# Altium PCB PCB-15_19_prototyp1.PcbDoc (part 3 of 4)
Units mm, origin at the board's own origin, x right, y up, seen from the top; angles counter-clockwise.
Board outline 190 x 150 mm, 8 copper layers (Top Layer, VCC3V3, Layer 2, layer 3, layer 4, layer 5, GND, Bottom Layer), stack 1.682 mm thick; 129 components, 396 nets, 1206 pads, 615 vias.
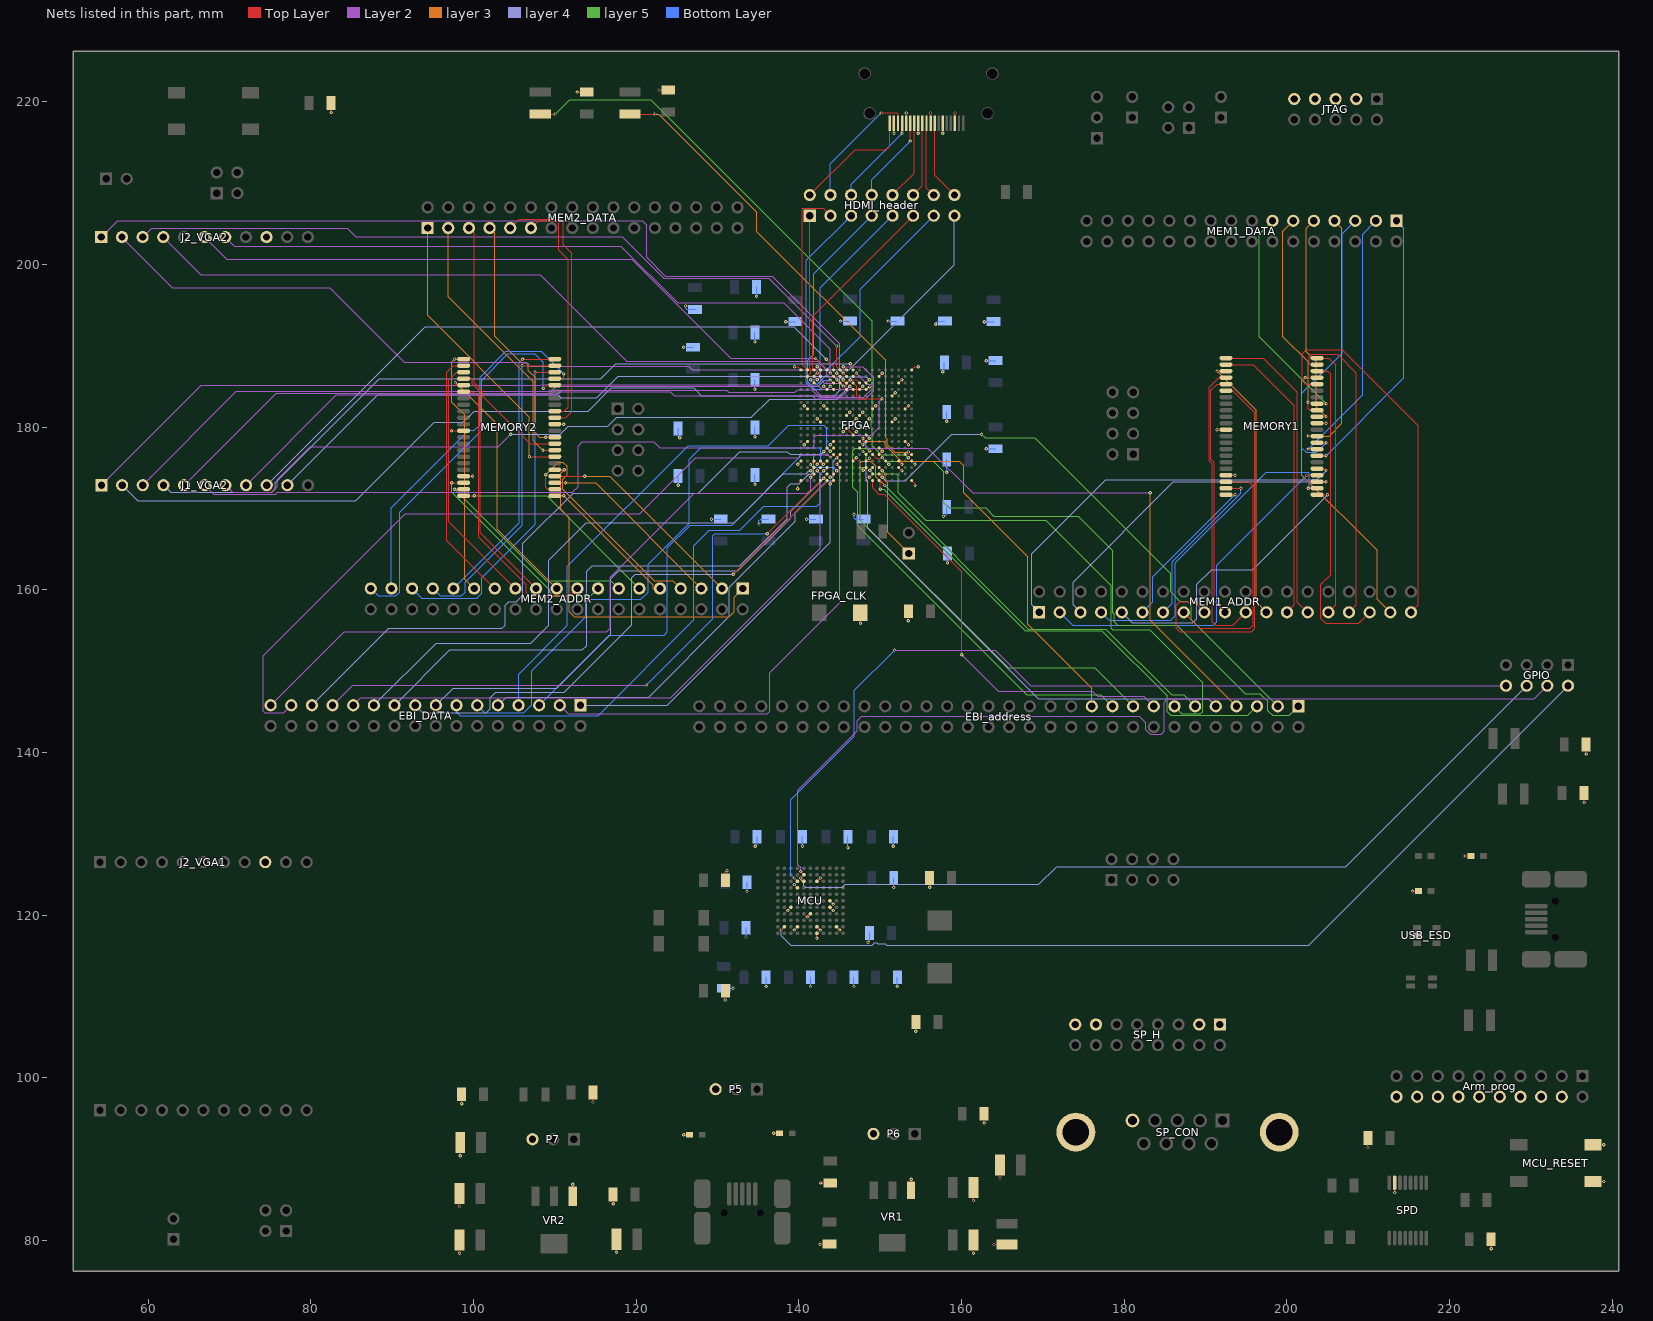
[diagram p9: the nets of this part, all layers, seen from the top]

## Via types
v1: diameter 0.4, hole 0.2, Top Layer to Bottom Layer, 599 vias
v2: diameter 0.4, hole 0.2, Top Layer to Bottom Layer, tented top, 8 vias
v3: diameter 7, hole 5, Top Layer to Bottom Layer, 4 vias
v4: diameter 1.3, hole 0.9, Top Layer to Bottom Layer, 3 vias
v5: diameter 2.1, hole 1.6, Top Layer to Bottom Layer, 1 vias

## Nets (pads, with @x,y where several pads share a name; then routed paths per layer and width w, separated by ;. In a path a pad name is that pad's centre, name@x,y a point inside that pad or via, vN(x,y) a via of type N, cw(c..) or ccw(c..) an arc to the next point about the centre after c; other vN are vias at no path point) (continued)
FPGA.A19: EBI_address.21 FPGA.M10 | length 50.7
  Top Layer w0.1: FPGA.M10@147.47,178.23 147.875,177.825 v1(147.879,177.825)
  layer 3 w0.1: v1(147.879,177.825) 148.305,178.252 150.408,178.252 150.656,178.003 150.656,177.744 152.581,175.819 159.715,175.819 160.274,175.26 160.274,171.933 168.123,164.084 168.123,155.778 176.022,147.879 EBI_address.21@176.022,145.669
FPGA.A20: EBI_address.19 FPGA.P11 | length 53
  Top Layer w0.1: FPGA.P11@148.27,176.63 v1(148.71,177.07)
  layer 5 w0.1: v1(148.71,177.07) 148.361,177.419 146.914,177.419 146.6,177.105 146.6,172.577 147.218,171.958 147.218,167.869 167.996,147.091 177.14,147.091 EBI_address.19@178.562,145.669
FPGA.A21: EBI_address.17 FPGA.N10 | length 52.9
  Top Layer w0.1: FPGA.N10@147.47,177.43 147.879,177.021 v1(147.879,177.013)
  layer 5 w0.1: v1(147.879,177.013) 148.311,176.581 148.207,175.055 147.574,175.049 147.574,168.554 165.735,150.393 176.378,150.393 EBI_address.17@181.102,145.669
FPGA.A22: EBI_address.15 FPGA.V12 | length 52.6
  Top Layer w0.1: FPGA.V12@149.07,173.43 149.07,172.522 149.837,171.755 150.495,171.755 160.02,162.23 v1(160.02,152.019)
  Layer 2 w0.1: v1(160.02,152.019) 164.516,147.523 176.098,147.523 176.733,146.888 182.423,146.888 EBI_address.15@183.642,145.669
FPGA.A23: EBI_address.13 FPGA.T12 | length 64
  Top Layer w0.1: v1(148.729,174.689) FPGA.T12@149.07,175.03
  layer 5 w0.1: v1(148.729,174.689) 149.149,174.269 151.994,174.269 152.222,174.041 152.222,171.929 155.606,168.546 170.335,168.546 178.402,160.479 178.402,155.278 178.616,155.064 183.137,155.064 189.636,148.565 189.636,145.009 189.382,144.755 187.096,144.755 EBI_address.13@186.182,145.669
FPGA.A24: EBI_address.11 FPGA.T11 | length 56
  Top Layer w0.1: v1(147.93,174.701) 147.941,174.701 FPGA.T11@148.27,175.03
  layer 5 w0.1: v1(150.571,172.822) 168.224,155.169 177.749,155.169 185.852,147.066 187.325,147.066 EBI_address.11@188.722,145.669
  layer 3 w0.1: v1(147.93,174.701) 147.523,175.108 147.523,175.616 147.708,175.8 148.837,175.8 149.479,175.158 149.479,173.914 v1(150.571,172.822)
FPGA.A25: EBI_address.9 FPGA.R11 | length 61.3
  Top Layer w0.1: FPGA.R11@148.27,175.83 148.463,175.83 148.463,175.946 v1(148.692,176.174)
  layer 4 w0.1: v1(148.692,176.174) 148.311,175.793 148.311,173.507 148.488,173.33 148.488,167.564 169.443,146.609 190.322,146.609 EBI_address.9@191.262,145.669
FPGA.AD00: EBI_DATA.31 FPGA.U3 | length 83.2
  Top Layer w0.1: v1(141.478,173.838) FPGA.U3@141.87,174.23
  Layer 2 w0.1: EBI_DATA.31@75.057,145.796 84.099,154.838 116.408,154.838 116.815,155.245 116.815,161.541 127.155,171.882 141.046,171.882 141.478,172.314 v1(141.478,173.838)
FPGA.AD01: EBI_DATA.29 FPGA.P6 | length 91.4
  Top Layer w0.1: v1(143.891,176.251) FPGA.P6@144.27,176.63
  Layer 2 w0.1: EBI_DATA.29@77.597,145.796 76.683,144.882 74.346,144.882 74.143,145.085 74.143,151.867 91.618,169.342 120.421,169.342 127.304,176.225 139.903,176.225 140.259,176.581 143.561,176.581 v1(143.891,176.251)
FPGA.AD02: EBI_DATA.27 FPGA.N5 | length 81.9
  Top Layer w0.1: v1(143.078,176.962) 143.078,177.038 FPGA.N5@143.47,177.43
  layer 4 w0.1: EBI_DATA.27@80.137,145.796 89.586,155.245 103.48,155.245 103.886,155.651 103.886,158.09 104.343,158.547 105.283,158.547 106.07,159.334 106.07,165.71 112.243,171.882 127.61,171.882 132.708,176.98 138.582,176.98 138.931,176.632 142.748,176.632 v1(143.078,176.962)
FPGA.AD03: EBI_DATA.25 FPGA.V4 | length 77.4
  Top Layer w0.1: v1(136.118,166.878) FPGA.V4@142.67,173.43
  Layer 2 w0.1: EBI_DATA.25@82.677,145.796 85.166,148.285 v1(121.26,148.285)
  Bottom Layer w0.1: v1(121.26,148.285) 129.388,156.413 129.388,166.624 129.642,166.878 v1(136.118,166.878)
FPGA.AD04: EBI_DATA.23 FPGA.T4 | length 75.6
  Top Layer w0.1: v1(142.265,174.625) FPGA.T4@142.67,175.03
  Layer 2 w0.1: EBI_DATA.23@85.217,145.796 86.157,146.736 124.231,146.736 142.621,165.125 142.621,174.269 v1(142.265,174.625)
FPGA.AD05: EBI_DATA.21 FPGA.T3 | length 70.9
  Top Layer w0.1: v1(141.465,174.625) FPGA.T3@141.87,175.03
  layer 4 w0.1: EBI_DATA.21@87.757,145.796 95.402,153.441 107.036,153.441 109.245,155.651 109.245,163.601 113.894,168.25 132.055,168.25 138.074,174.269 140.883,174.269 141.238,174.625 v1(141.465,174.625)
FPGA.AD06: EBI_DATA.19 FPGA.R3 | length 72.7
  Top Layer w0.1: v1(141.427,175.387) FPGA.R3@141.87,175.83
  layer 4 w0.1: EBI_DATA.19@90.297,145.796 97.104,152.603 113.386,152.603 113.919,153.137 113.919,162.255 114.605,162.941 132.74,162.941 138.557,168.758 138.557,172.616 138.989,173.048 140.079,173.048 141.224,174.193 141.529,174.193 141.834,174.498 141.834,174.981 v1(141.427,175.387)
FPGA.AD07: EBI_DATA.17 FPGA.V5 | length 67
  Top Layer w0.1: v1(131.94,161.9) FPGA.V5@143.47,173.43
  layer 4 w0.1: EBI_DATA.17@92.837,145.796 93.751,144.882 101.6,144.882 102.083,145.364 102.083,146.71 102.743,147.371 111.15,147.371 119.482,155.702 119.482,161.493 119.888,161.9 v1(131.94,161.9)
FPGA.AD08: EBI_DATA.15 FPGA.U5 | length 64.4
  Top Layer w0.1: v1(143.078,173.711) 143.078,173.838 FPGA.U5@143.47,174.23
  layer 4 w0.1: EBI_DATA.15@95.377,145.796 97.485,147.904 110.236,147.904 116.891,154.559 116.891,161.341 117.856,162.306 132.499,162.306 139.014,168.822 139.014,169.647 v1(143.078,173.711)
FPGA.AD09: EBI_DATA.13 FPGA.T5 | length 66.7
  Top Layer w0.1: v1(143.078,174.625) 143.281,174.828 143.47,174.828 FPGA.T5@143.47,175.03
  Bottom Layer w0.1: EBI_DATA.13@97.917,145.796 97.917,144.958 98.349,144.526 115.316,144.526 127.102,156.312 127.102,165.43 128.981,167.31 132.74,167.31 135.687,170.256 142.189,170.256 142.621,170.688 142.621,174.168 v1(143.078,174.625)
FPGA.AD10: EBI_DATA.11 FPGA.R5 | length 69
  Top Layer w0.1: v1(143.002,175.438) 143.078,175.438 FPGA.R5@143.47,175.83
  Bottom Layer w0.1: EBI_DATA.11@100.457,145.796 101.371,144.882 106.197,144.882 107.163,145.847 107.163,150.063 113.792,156.693 113.792,158.42 114.198,158.826 120.574,158.826 121.463,159.715 121.463,163.119 126.517,168.173 126.517,176.073 127.914,177.47 142.646,177.47 142.697,177.419 142.697,175.743 v1(143.002,175.438)
FPGA.AD11: EBI_DATA.9 FPGA.P7 | length 58.9
  Top Layer w0.1: v1(144.678,176.225) 144.678,176.238 FPGA.P7@145.07,176.63
  layer 4 w0.1: EBI_DATA.9@102.997,145.796 104.013,146.812 121.564,146.812 131.47,156.718 131.47,160.325 139.548,168.402 139.548,169.443 143.485,173.38 144.069,173.38 144.221,173.533 144.221,175.768 v1(144.678,176.225)
FPGA.AD12: EBI_DATA.7 FPGA.N6 | length 62.4
  Top Layer w0.1: v1(143.866,177.038) 143.878,177.038 FPGA.N6@144.27,177.43
  Bottom Layer w0.1: EBI_DATA.7@105.537,145.796 105.537,149.631 111.531,155.626 111.531,162.865 126.39,177.724 136.22,177.724 138.735,180.238 143.053,180.238 143.459,179.832 143.459,177.444 v1(143.866,177.038)
FPGA.AD13: EBI_DATA.5 FPGA.T7 | length 57.4
  Top Layer w0.1: v1(144.672,174.632) FPGA.T7@145.07,175.03
  Bottom Layer w0.1: EBI_DATA.5@108.077,145.796 116.713,154.432 123.444,154.432 123.85,154.838 123.85,165.151 126.644,167.945 131.724,167.945 140.36,176.581 141.63,176.581 141.834,176.378 141.834,175.26 142.037,175.057 144.247,175.057 v1(144.672,174.632)
FPGA.AD14: EBI_DATA.3 FPGA.R7 | length 61
  Top Layer w0.1: v1(144.678,175.438) FPGA.R7@145.07,175.83
  Layer 2 w0.1: EBI_DATA.3@110.617,145.796 111.658,144.755 136.144,144.755 136.423,145.034 136.423,149.809 145.034,158.42 145.034,175.082 v1(144.678,175.438)
FPGA.AD15: EBI_DATA.1 FPGA.V6 | length 46.8
  Top Layer w0.1: v1(143.866,173.025) FPGA.V6@144.27,173.43
  layer 4 w0.1: EBI_DATA.1@113.157,145.796 123.825,145.796 143.866,165.837 v1(143.866,173.025)
FPGA.CLK_SIG: CLK_JMP.1 FPGA.T13 | length 12.1
  Top Layer w0.1: FPGA.T13@149.87,175.03 150.266,174.634 v1(150.266,174.625)
  layer 3 w0.1: v1(150.266,174.625) 150.622,174.269 150.622,173.471 150.921,173.172 150.921,167.062 CLK_JMP.1@153.524,164.459
FPGA.CS0: EBI_address.5 FPGA.V13 | length 60.6
  Top Layer w0.1: FPGA.V13@149.87,173.43 150.063,173.237 150,173.174 v1(150,172.37)
  layer 5 w0.1: v1(150,172.37) 150.413,172.37 167.818,154.965 177.241,154.965 185.268,146.939 185.268,145.009 185.725,144.551 195.224,144.551 EBI_address.5@196.342,145.669
FPGA.CS1: EBI_address.7 FPGA.M11 | length 69.7
  Top Layer w0.1: v1(147.879,178.638) 147.879,178.621 FPGA.M11@148.27,178.23
  Layer 2 w0.1: v1(147.879,178.638) 147.879,178.32 148.229,177.97 148.229,177.711 148.52,177.42 155.879,177.42 161.366,171.933 v1(183.21,171.933)
  layer 3 w0.1: v1(183.21,171.933) 183.21,156.261 EBI_address.7@193.802,145.669
FPGA.REN: EBI_address.1 FPGA.P12 | length 74.1
  Top Layer w0.1: FPGA.P12@149.07,176.63 149.54,176.16 150.16,176.16 v1(150.25,176.25)
  layer 5 w0.1: v1(150.25,176.25) 150.673,175.826 150.673,175.793 156.54,175.793 157.836,174.498 157.836,170.688 158.471,170.053 162.966,170.053 163.982,169.037 174.346,169.037 178.602,164.781 178.602,157.201 178.791,157.012 178.791,156.058 179.197,155.651 186.461,155.651 194.869,147.244 196.687,147.244 197.668,146.263 197.668,145.127 198.244,144.551 200.304,144.551 EBI_address.1@201.422,145.669
FPGA.WEN: EBI_address.3 FPGA.U13 | length 67.9
  Top Layer w0.1: FPGA.U13@149.87,174.23 150.262,173.838 v1(150.266,173.838)
  layer 5 w0.1: v1(162.458,179.121) 162.916,178.664 169.012,178.664 185.699,161.976 185.699,159.737 186.839,158.598 187.757,158.598 188.265,158.09 188.265,156.286 EBI_address.3@198.882,145.669
  layer 4 w0.1: v1(150.266,173.838) 150.698,173.406 153.06,173.406 158.775,179.121 v1(162.458,179.121)
FPGA_LEDS.LED_1: FPGA.P17 R3.1 | length 59.4
  Top Layer w0.1: R3.1@119.253,218.487 v1(122.326,218.487) ; FPGA.P17@153.07,176.63 153.314,176.63 153.467,176.782 v1(153.467,176.936)
  layer 3 w0.1: v1(122.326,218.487) 122.762,218.487 134.837,206.412 134.837,204.024 150.673,188.189 150.673,178.669 150.89,178.452 150.89,177.817 151.77,176.936 v1(153.467,176.936)
FPGA_LEDS.LED_2: FPGA.P18 R4.1 | length 73.9
  Top Layer w0.1: R4.1@108.204,218.487 v1(110.033,218.487) ; v1(153.465,176.225) FPGA.P18@153.87,176.63
  layer 5 w0.1: v1(110.033,218.487) 111.815,220.269 121.768,220.269 149.022,193.015 149.022,180.881 148.929,180.788 148.929,179.781 149.022,179.688 149.022,177.714 150.136,176.6 153.09,176.6 v1(153.465,176.225)
FPGA_VGA-I/O.J1_P2: FPGA.A6 J1_VGA2.9 | length 80.2
  Top Layer w0.1: v1(143.358,188.339) 144.27,187.427 FPGA.A6@144.27,187.03
  layer 4 w0.1: J1_VGA2.9@74.58,172.86 94.047,192.327 139.37,192.327 v1(143.358,188.339)
FPGA_VGA-I/O.J1_P3: FPGA.C7 J1_VGA2.10 | length 74.1
  Top Layer w0.1: v1(144.678,185.826) 144.678,185.822 FPGA.C7@145.07,185.43
  layer 4 w0.1: J1_VGA2.10@77.12,172.86 88.207,183.947 110.4,183.947 110.744,183.603 115.175,183.603 117.805,186.233 144.272,186.233 v1(144.678,185.826)
FPGA_VGA-I/O.J1_P8: FPGA.A8 J1_VGA2.8 | length 89.2
  Top Layer w0.1: v1(145.466,187.427) 145.473,187.427 FPGA.A8@145.87,187.03
  Layer 2 w0.1: J1_VGA2.8@72.04,172.86 83.127,183.947 110.185,183.947 110.592,184.353 124.206,184.353 124.689,183.871 141.602,183.871 141.993,183.48 148.22,183.48 149.216,184.476 149.216,186.089 147.879,187.427 v1(145.466,187.427)
FPGA_VGA-I/O.J1_P9: FPGA.D9 J1_VGA2.7 | length 83.6
  Top Layer w0.1: v1(146.27,185.03) FPGA.D9@146.67,184.63
  Layer 2 w0.1: J1_VGA2.7@69.5,172.86 70.4,171.96 75.186,171.96 75.895,172.669 75.895,173.533 79.934,177.571 103.048,177.571 v1(104.597,179.121)
  layer 4 w0.1: v1(104.597,179.121) 110.668,179.121 111.633,180.086 116.51,180.086 117.627,181.204 134.163,181.204 136.398,183.439 144.678,183.439 v1(146.27,185.03)
FPGA_VGA-I/O.J1_P10: FPGA.C9 J1_VGA2.6 | length 99.7
  Top Layer w0.1: FPGA.C9@146.67,185.43 147.091,185.009 147.091,183.693 147.295,183.49 v1(150.241,183.49)
  Layer 2 w0.1: J1_VGA2.6@66.96,172.86 68.06,171.76 75.68,171.76 75.878,171.958 112.166,171.958 112.878,172.669 112.878,177.673 113.386,178.181 122.174,178.181 122.885,177.47 141.63,177.47 141.91,177.749 141.91,178.816 142.113,179.019 148.92,179.019 149.911,180.01 149.911,183.159 v1(150.241,183.49)
FPGA_VGA-I/O.J1_P11: FPGA.B9 J1_VGA2.5 | length 94.1
  Top Layer w0.1: FPGA.B9@146.67,186.23 v1(147.079,186.639)
  Layer 2 w0.1: J1_VGA2.5@64.42,172.86 75.735,184.175 109.652,184.175 110.033,184.556 131.115,184.556 131.394,184.277 139.522,184.277 139.852,184.607 141.593,184.607 142.52,183.68 147.987,183.68 149.016,184.709 149.016,185.121 148.844,185.293 148.425,185.293 v1(147.079,186.639)
FPGA_VGA-I/O.J1_P12: FPGA.A9 J1_VGA2.4 | length 92.7
  Top Layer w0.1: v1(146.329,187.782) 146.67,187.442 FPGA.A9@146.67,187.03
  layer 4 w0.1: J1_VGA2.4@61.88,172.86 62.782,171.958 75.184,171.958 75.616,172.39 75.616,173.126 88.412,185.922 115.641,185.922 117.5,187.782 v1(146.329,187.782)
FPGA_VGA-I/O.J1_P13: FPGA.D11 J1_VGA2.3 | length 95.8
  Top Layer w0.1: FPGA.D11@148.27,184.63 148.577,184.937 v1(148.666,184.937)
  Layer 2 w0.1: J1_VGA2.3@59.34,172.86 70.859,184.379 109.55,184.379 110.185,185.014 141.586,185.014 142.72,183.88 145.424,183.88 146.202,184.658 148.387,184.658 v1(148.666,184.937)
FPGA_VGA-I/O.J1_P14: FPGA.C11 J1_VGA2.2 | length 101.3
  Top Layer w0.1: FPGA.C11@148.27,185.43 v1(148.666,185.826)
  layer 4 w0.1: J1_VGA2.2@56.8,172.86 58.718,170.942 85.522,170.942 95.148,180.569 98.679,180.569 100.076,181.966 114.122,181.966 116.967,184.81 127.076,184.81 128.016,183.871 144.399,183.871 145.034,184.506 145.034,185.928 145.288,186.182 148.311,186.182 v1(148.666,185.826)
FPGA_VGA-I/O.J1_P15: FPGA.C10 J1_VGA2.1 | length 99.5
  Top Layer w0.1: v1(146.329,185.826) 147.074,185.826 FPGA.C10@147.47,185.43
  Layer 2 w0.1: J1_VGA2.1@54.26,172.86 66.515,185.115 108.229,185.115 108.331,185.217 142.291,185.217 142.85,184.658 145.694,184.658 145.821,184.785 145.821,185.318 v1(146.329,185.826)
FPGA_VGA-I/O.J2_P0: FPGA.A5 J2_VGA2.6 | length 83.3
  Top Layer w0.1: v1(142.062,188.443) 142.062,188.438 FPGA.A5@143.47,187.03
  Layer 2 w0.1: J2_VGA2.6@66.94,203.36 69.691,200.609 119.456,200.609 131.623,188.443 v1(142.062,188.443)
FPGA_VGA-I/O.J2_P1: FPGA.B6 J2_VGA2.7 | length 83.6
  Top Layer w0.1: v1(143.866,186.639) 143.866,186.634 FPGA.B6@144.27,186.23
  Layer 2 w0.1: J2_VGA2.7@69.48,203.36 70.58,202.26 118.11,202.26 125.095,195.275 138.176,195.275 143.866,189.586 v1(143.866,186.639)
FPGA_VGA-I/O.J2_P4: FPGA.A7 J2_VGA2.3 | length 94.9
  Top Layer w0.1: v1(144.678,189.967) 144.678,187.422 FPGA.A7@145.07,187.03
  Layer 2 w0.1: J2_VGA2.3@59.32,203.36 60.42,204.46 84.465,204.46 85.522,203.403 118.3,203.403 123.38,198.323 136.322,198.323 v1(144.678,189.967)
FPGA_VGA-I/O.J2_P5: FPGA.D8 J2_VGA2.2 | length 97.4
  Top Layer w0.1: v1(145.461,185.039) FPGA.D8@145.87,184.63
  Layer 2 w0.1: J2_VGA2.2@56.78,203.36 62.985,197.155 82.321,197.155 91.516,187.96 106.451,187.96 106.909,187.503 126.441,187.503 126.924,187.02 142.545,187.02 142.672,186.893 142.672,185.877 143.154,185.395 145.105,185.395 v1(145.461,185.039)
FPGA_VGA-I/O.J2_P6: FPGA.C8 J2_VGA2.4 | length 91.9
  Top Layer w0.1: v1(145.466,185.826) 145.593,185.43 FPGA.C8@145.87,185.43
  Layer 2 w0.1: J2_VGA2.4@61.86,203.36 66.465,198.755 108.204,198.755 118.872,188.087 142.328,188.087 143.42,186.995 143.42,186.45 143.662,186.207 145.085,186.207 v1(145.466,185.826)
FPGA_VGA-I/O.J2_P7: FPGA.B8 J2_VGA2.1 | length 104.6
  Top Layer w0.1: v1(145.466,186.639) 145.466,186.634 FPGA.B8@145.87,186.23
  Layer 2 w0.1: J2_VGA2.1@54.24,203.36 56.264,205.384 120.726,205.384 121.285,204.826 121.285,200.863 123.596,198.552 136.754,198.552 145.034,190.271 145.034,187.071 v1(145.466,186.639)
GND: ?.2 ?.5 ?.8 ?.11 ?.14 ?.17 Arm_prog.4 Arm_prog.6 Arm_prog.8 Arm_prog.10 Arm_prog.12 Arm_prog.14 Arm_prog.16 Arm_prog.18 Arm_prog.20 C1.2 C2.1 C3.1 C4.1 C5.1 C6.1 C7.1 C8.1 C9.1 C10.1 C11.1 C12.1 C13.1 C14.1 C15.1 C16.1 C17.1 C18.1 C19.1 C20.2 C21.1 C22.1 C23.1 C24.1 C25.2 C27.1 C28.1 C29.1 C30.1 C33.1 C35.1 C36.2 C37.2 C38.1 C39.1 C40.2 C41.2 C42.2 C43.1 C44.2 C45.2 C46.1 C47.1 C48.2 C49.2 C50.1 C51.1 C52.1 C53.1 C54.2 C55.2 C56.2 C57.1 C58.1 C59.2 C60.2 C61.1 D1.2 D2.2 D3.2 D4.2 D5.2 D6.2 FPGA.A1 FPGA.A18 FPGA.B7 FPGA.B13 FPGA.C3 FPGA.C16 FPGA.D5 FPGA.D10 FPGA.E15 FPGA.G2 FPGA.G5 FPGA.G12 FPGA.G17 FPGA.H8 FPGA.H10 FPGA.J4 FPGA.J9 FPGA.J11 FPGA.J15 FPGA.K8 FPGA.K10 FPGA.L9 FPGA.L11 FPGA.M2 FPGA.M6 FPGA.M17 FPGA.N13 FPGA.P13 FPGA.R1 FPGA.R4 FPGA.R9 FPGA.R14 FPGA.R16 FPGA.R18 FPGA.T16 FPGA.U6 FPGA.U12 FPGA.V1 FPGA.V18 FPGA_CLK.2 J2_VGA1.9 J2_VGA2.9 JTAG.3 JTAG.5 JTAG.7 JTAG.9 L3.1 L4.1 L5.1 L6.1 MCU.C7 MCU.D4 MCU.F9 MCU.G3 MCU.G9 MCU.H6 MCU.K4 MCU.K7 MCU.K10 MCU.L7 MCU_RESET.2 MCU_RESET.4 MEMORY1.12 MEMORY1.34 MEMORY1.41 MEMORY2.12 MEMORY2.34 MEMORY2.41 P5.3 P6.3 P7.3 R7.2 SP_CON.5 SP_CON.10 SP_CON.11 SP_H.1 SP_H.3 SP_H.13 SP_H.15 SPD.15 USB_ESD.2 VR1.1 VR2.1 | length 136.6
  Top Layer w0.1: v1(82.503,218.687) R7.2@82.503,219.837 ; v1(97.288,179.559) MEMORY2.34@98.794,179.559 ; v1(98.275,78.44) C12.1@98.275,80.04 ; v1(98.275,84.17) C13.1@98.275,85.77 ; v1(98.385,90.42) C61.1@98.385,92.02 ; v1(98.55,96.82) C30.1@98.55,97.97 ; MEMORY2.41@98.794,173.959 v1(99.894,173.959) ; MEMORY2.12@109.994,180.359 v1(111.094,180.359) ; VR2.1@112.206,85.406 v1(112.206,86.906) ; v1(112.769,221.187) D6.2@113.919,221.187 ; v1(114.69,97.02) D2.2@114.69,98.17 ; v1(117.18,84.51) C29.1@117.18,85.66 ; v1(117.575,78.55) C11.1@117.575,80.15 ; v1(122.802,221.441) D5.2@123.952,221.441 ; v1(125.85,92.99) L6.1@126.575,92.99 ; v1(130.968,109.555) C22.1@130.968,110.705 ; C21.1@130.968,124.294 130.968,125.273 131.139,125.444 v1(131.171,125.444) ; v1(136.92,93.18) L5.1@137.645,93.18 ; v1(138.629,120.554) MCU.G3@139.029,120.954 ; v1(139.429,118.154) MCU.K4@139.829,118.554 ; v1(139.429,123.754) MCU.D4@139.829,123.354 ; v1(139.464,187.43) 139.87,187.43 FPGA.A1@140.27,187.03 ; v1(139.87,172.42) 139.87,173.03 FPGA.V1@140.27,173.43 ; v1(139.87,175.43) FPGA.R1@140.27,175.83 ; v1(140.67,177.83) FPGA.M2@141.07,178.23 ; v1(140.67,182.63) FPGA.G2@141.07,182.23 ; v1(141.029,119.754) MCU.H6@141.429,120.154 ; v1(141.47,185.83) FPGA.C3@141.87,185.43 ; v1(142.223,117.151) 142.229,117.157 MCU.L7@142.229,117.754 ; MCU.K7@142.229,118.554 v1(142.629,118.154) ; MCU.C7@142.229,124.154 v1(142.629,124.554) ; v1(142.27,175.43) FPGA.R4@142.67,175.83 ; v1(142.27,181.03) FPGA.J4@142.67,180.63 ; v1(142.61,79.54) C28.1@143.76,79.54 ; v1(142.71,87.07) C27.1@143.86,87.07 ; v1(143.07,182.63) FPGA.G5@143.47,182.23 ; v1(143.07,185.03) FPGA.D5@143.47,184.63 ; MCU.G9@143.829,120.954 v1(144.229,120.554) ; MCU.F9@143.829,121.754 v1(144.229,121.354) ; v1(143.87,173.83) FPGA.U6@144.27,174.23 ; v1(143.87,177.83) FPGA.M6@144.27,178.23 ; MCU.K10@144.629,118.554 v1(145.029,118.154) ; v1(144.67,186.63) FPGA.B7@145.07,186.23 ; v1(145.47,179.43) FPGA.K8@145.87,179.83 FPGA.L9@146.67,179.03 ; FPGA.H8@145.87,181.43 v1(146.27,181.83) ; FPGA.R9@146.67,175.83 v1(147.07,176.23) ; FPGA.J9@146.67,180.63 v1(147.07,181.03) ; v1(147.07,179.43) FPGA.K10@147.47,179.83 ; FPGA.H10@147.47,181.43 v1(147.87,181.83) ; FPGA.D10@147.47,184.63 v1(147.87,185.03) ; v1(147.574,155.874) FPGA_CLK.2@147.574,157.174 ; FPGA.L11@148.27,179.03 v1(148.67,178.63) ; FPGA.J11@148.27,180.63 v1(148.67,181.03) ; v1(148.67,173.83) FPGA.U12@149.07,174.23 ; FPGA.G12@149.07,182.23 v1(149.47,182.63) ; FPGA.P13@149.87,176.63 v1(150.27,177.03) FPGA.N13@149.87,177.43 ; FPGA.B13@149.87,186.23 v1(150.27,186.63) ; FPGA.R14@150.67,175.83 v1(151.07,175.43) ; FPGA.J15@151.47,180.63 v1(151.87,181.03) ; FPGA.E15@151.47,183.83 v1(151.87,184.23) ; v1(151.695,216.117) ?.2@151.695,217.367 ; FPGA.T16@152.27,175.03 v1(152.67,174.63) ; FPGA.R16@152.27,175.83 v1(152.67,175.43) ; FPGA.C16@152.27,185.43 v1(152.67,185.83) ; FPGA.M17@153.07,178.23 v1(153.47,177.83) ; FPGA.G17@153.07,182.23 v1(153.47,182.63) ; ?.5@153.195,217.367 v1(153.195,218.617) ; v1(153.463,156.203) C25.2@153.463,157.353 ; VR1.1@153.811,86.156 v1(153.811,87.531) ; FPGA.V18@153.87,173.43 154.27,173.03 v1(154.27,172.827) ; FPGA.R18@153.87,175.83 v1(154.27,175.43) ; FPGA.A18@153.87,187.03 154.27,187.43 v1(154.676,187.43) ; v1(154.39,105.72) C23.1@154.39,106.87 ; v1(154.695,216.117) ?.8@154.695,217.367 ; v1(156.09,123.42) C24.1@156.09,124.57 ; ?.11@156.195,217.367 v1(156.195,218.617) ; v1(157.695,216.117) ?.14@157.695,217.367 ; ?.17@159.195,217.367 v1(159.195,218.617) ; v1(161.465,78.44) C4.1@161.465,80.04 ; v1(161.465,84.91) C5.1@161.465,86.51 ; v1(162.79,94.43) D1.2@162.79,95.58 ; v1(164,79.505) C7.1@165.6,79.505 ; v1(164.735,87.68) C6.1@164.735,89.28 ; v1(191.42,179.686) MEMORY1.34@192.52,179.686 ; MEMORY1.41@192.52,174.086 v1(193.62,174.086) ; MEMORY1.12@203.72,180.486 v1(204.82,180.486) ; v1(209.978,91.433) C35.1@209.978,92.583 ; v1(213.259,85.893) SPD.15@213.259,87.093 ; v1(215.192,117.492) USB_ESD.2@215.992,117.492 ; v1(215.438,122.953) L3.1@216.163,122.953 ; v1(221.915,127.271) L4.1@222.64,127.271 ; v1(225.124,78.987) C33.1@225.124,80.137 ; v1(236.554,133.851) D4.2@236.554,135.001 ; v1(236.808,139.82) D3.2@236.808,140.97 ; MCU_RESET.2@237.617,87.249 v1(238.967,87.249) ; MCU_RESET.4@237.617,91.749 v1(238.967,91.749)
  Bottom Layer w0.1: v1(125.17,172.834) C40.2@125.17,173.984 ; C44.2@125.17,179.826 125.17,178.879 v1(125.373,178.676) ; v1(125.831,189.812) C45.2@126.981,189.812 ; v1(126.085,194.884) 126.085,194.58 126.187,194.478 C46.1@127.235,194.478 ; v1(129.26,168.683) C60.2@130.41,168.683 ; C17.1@130.761,111.006 v1(131.911,111.006) ; v1(133.508,117.302) C18.1@133.508,118.452 ; v1(133.635,122.89) C20.2@133.635,124.04 ; v1(134.601,172.961) C39.1@134.601,174.111 ; v1(134.601,178.803) C38.1@134.601,179.953 ; v1(134.601,184.645) C37.2@134.601,185.795 ; v1(134.601,190.487) C36.2@134.601,191.637 ; v1(134.655,128.478) 134.858,128.681 C10.1@134.858,129.628 ; v1(134.808,196.075) C52.1@134.808,197.225 ; v1(135.102,168.073) 135.102,168.454 135.331,168.683 C59.2@136.252,168.683 ; v1(135.981,111.206) C9.1@135.981,112.356 ; v1(138.404,192.954) C51.1@139.554,192.954 ; v1(140.446,128.478) C14.1@140.446,129.628 ; v1(140.944,168.683) C58.1@142.094,168.683 ; v1(141.442,111.206) C8.1@141.442,112.356 ; v1(145.135,193.034) C50.1@146.285,193.034 ; v1(146.034,128.275) C16.1@146.034,129.628 ; v1(146.776,111.206) C3.1@146.776,112.356 ; v1(146.786,169.293) 146.786,168.811 146.914,168.683 C57.1@147.936,168.683 ; v1(148.512,116.667) 148.715,116.87 C1.2@148.715,117.817 ; v1(150.977,193.034) C49.2@152.127,193.034 ; v1(151.622,128.478) C15.1@151.622,129.628 ; v1(151.669,123.398) C19.1@151.669,124.548 ; v1(152.11,111.206) C2.1@152.11,112.356 ; v1(156.819,192.628) 156.819,192.779 157.074,193.034 C48.2@157.969,193.034 ; v1(157.686,186.804) 157.889,187.007 C53.1@157.889,187.954 ; v1(157.784,169.024) 157.948,169.024 158.19,169.266 C56.2@158.19,170.174 ; v1(158.19,174.46) C55.2@158.19,176.016 ; v1(158.19,180.708) C54.2@158.19,181.858 ; v1(158.27,163.309) C47.1@158.27,164.459 ; v1(162.788,192.954) 162.788,192.751 162.991,192.954 C43.1@163.938,192.954 ; v1(163.042,177.333) C41.2@164.192,177.333 ; v1(163.042,188.161) C42.2@164.192,188.161
GPIO.GPIO0: GPIO.2 MCU.K2 | length 111.9
  Top Layer w0.1: v1(137.82,118.161) 137.836,118.161 MCU.K2@138.229,118.554
  layer 4 w0.1: v1(137.82,118.161) 137.82,117.475 138.989,116.307 149.042,116.307 149.305,116.57 149.595,116.57 149.715,116.45 150.645,116.45 150.788,116.307 202.667,116.307 GPIO.2@234.569,148.209
GPIO.GPIO1: GPIO.4 MCU.B5 | length 113.3
  Top Layer w0.1: v1(140.233,125.349) MCU.B5@140.629,124.954
  Layer 2 w0.1: v1(140.233,125.349) 140.233,125.856 139.883,126.206 139.883,135.362 147.168,142.646 147.168,143.866 147.749,144.447 181.864,144.447 182.677,143.634 182.677,142.773 183.221,142.229 184.531,142.229 184.912,142.61 184.912,146.177 185.318,146.583 230.403,146.583 GPIO.4@232.029,148.209
GPIO.GPIO2: GPIO.6 MCU.C5 | length 100.9
  Top Layer w0.1: v1(140.233,124.562) 140.233,124.55 MCU.C5@140.629,124.154
  layer 4 w0.1: v1(140.233,124.562) 140.233,124.333 140.614,123.952 140.614,123.596 140.818,123.393 145.339,123.393 145.72,123.774 169.52,123.774 171.704,125.959 207.239,125.959 GPIO.6@229.489,148.209
GPIO.GPIO3: GPIO.8 MCU.C4 | length 111
  Top Layer w0.1: v1(139.421,124.562) MCU.C4@139.829,124.154
  Layer 2 w0.1: v1(151.765,152.578) 164.135,152.578 168.504,148.209 GPIO.8@226.949,148.209
  Bottom Layer w0.1: v1(139.421,124.562) 139.02,124.962 139.02,134.168 146.812,141.961 146.812,147.625 v1(151.765,152.578)
HDMI.CLK+: FPGA.B4 HDMI_header.13 | length 29
  Top Layer w0.1: v1(142.25,186.65) FPGA.B4@142.67,186.23
  Bottom Layer w0.1: v1(142.25,186.65) 141.91,186.309 141.91,185.42 142.011,185.318 142.316,185.318 143.459,186.461 143.459,187.046 147.523,191.11 147.523,196.926 HDMI_header.13@156.591,205.994
HDMI.CLK-: FPGA.A4 HDMI_header.15 | length 28.9
  Top Layer w0.1: v1(142.265,187.427) 142.273,187.427 FPGA.A4@142.67,187.03
  layer 4 w0.1: v1(142.265,187.427) 142.621,187.071 146.228,187.071 159.131,199.974 HDMI_header.15@159.131,205.994
HDMI.D0+: FPGA.B3 HDMI_header.9 | length 24.6
  Top Layer w0.1: FPGA.B3@141.87,186.23 142.265,185.835 v1(142.265,185.826)
  Bottom Layer w0.1: v1(142.265,185.826) 142.621,186.182 142.621,197.104 HDMI_header.9@151.511,205.994
HDMI.D0-: FPGA.A3 HDMI_header.11 | length 24.1
  Top Layer w0.1: FPGA.A3@141.87,187.03 141.712,187.188 141.712,193.655 HDMI_header.11@154.051,205.994
HDMI.D1+: FPGA.D6 HDMI_header.5 | length 26.8
  Top Layer w0.1: v1(143.861,185.039) FPGA.D6@144.27,184.63
  Bottom Layer w0.1: v1(143.861,185.039) 143.48,184.658 141.732,184.658 140.92,185.47 140.92,200.483 HDMI_header.5@146.431,205.994
HDMI.D1-: FPGA.C6 HDMI_header.7 | length 27.5
  Top Layer w0.1: v1(143.866,185.776) 143.924,185.776 FPGA.C6@144.27,185.43
  Bottom Layer w0.1: v1(143.866,185.776) 143.104,185.776 142.367,185.039 141.665,185.039 141.12,185.584 141.12,188.186 141.859,188.925 141.859,198.882 HDMI_header.7@148.971,205.994
HDMI.D2+: FPGA.B2 HDMI_header.1 | length 20
  Top Layer w0.1: FPGA.B2@141.07,186.23 141.478,186.638 141.478,187.096 141.351,187.223 HDMI_header.1@141.351,205.994
HDMI.D2-: FPGA.A2 HDMI_header.3 | length 24
  Top Layer w0.1: FPGA.A2@141.07,187.03 140.437,187.663 140.437,206.908 142.977,206.908 HDMI_header.3@143.891,205.994
I_HDMI.CLK+: ?.10 HDMI_header.14 | length 9.2
  Top Layer w0.1: ?.10@155.695,217.367 155.695,209.43 HDMI_header.14@156.591,208.534
I_HDMI.CLK-: ?.12 HDMI_header.16 | length 9.8
  Top Layer w0.1: ?.12@156.695,217.367 156.695,210.97 HDMI_header.16@159.131,208.534
I_HDMI.D0+: ?.7 HDMI_header.10 | length 9.9
  Top Layer w0.1: HDMI_header.10@151.511,208.534 154.195,211.218 ?.7@154.195,217.367
I_HDMI.D0-: ?.9 HDMI_header.12 | length 9.3
  Top Layer w0.1: HDMI_header.12@154.051,208.534 155.195,209.678 ?.9@155.195,217.367
I_HDMI.D1+: ?.4 HDMI_header.6 | length 11.4
  Top Layer w0.1: v1(152.695,216.129) ?.4@152.695,217.367
  Bottom Layer w0.1: HDMI_header.6@146.431,208.534 146.431,209.865 v1(152.695,216.129)
I_HDMI.D1-: ?.6 HDMI_header.8 | length 10.8
  Top Layer w0.1: v1(153.695,215.163) ?.6@153.695,217.367
  Bottom Layer w0.1: HDMI_header.8@148.971,208.534 148.971,210.439 v1(153.695,215.163)
I_HDMI.D2+: ?.1 HDMI_header.2 | length 15.2
  Top Layer w0.1: HDMI_header.2@141.351,208.534 146.942,214.125 150.774,214.125 151.195,214.546 ?.1@151.195,217.367
I_HDMI.D2-: ?.3 HDMI_header.4 | length 15.9
  Top Layer w0.1: v1(150.114,218.618) 152.017,218.618 152.195,218.44 ?.3@152.195,217.367
  Bottom Layer w0.1: HDMI_header.4@143.891,208.534 143.891,212.395 v1(150.114,218.618)
I_MEMORY.ADDR0_Data_mem1: MEM1_ADDR.1 MEMORY1.5 | length 49.2
  Top Layer w0.1: MEMORY1.5@203.72,174.886 204.59,174.886 v1(204.826,174.65)
  layer 4 w0.1: MEM1_ADDR.1@169.545,157.226 168.631,158.14 168.631,164.414 177.749,173.533 203.708,173.533 v1(204.826,174.65)
I_MEMORY.ADDR0_Data_mem2: MEM2_ADDR.1 MEMORY2.5 | length 43.3
  Top Layer w0.1: MEMORY2.5@109.994,174.759 v1(111.15,174.759)
  layer 3 w0.1: v1(111.15,174.759) 110.719,174.327 110.719,169.901 111.785,168.834 111.785,157.277 112.37,156.693 131.47,156.693 132.055,157.277 132.055,159.106 MEM2_ADDR.1@133.096,160.147
I_MEMORY.ADDR1_Data_mem1: MEM1_ADDR.3 MEMORY1.4 | length 44
  Top Layer w0.1: v1(202.413,174.041) 202.458,174.086 MEMORY1.4@203.72,174.086
  Bottom Layer w0.1: MEM1_ADDR.3@172.085,157.226 173.66,155.651 190.983,155.651 191.389,156.058 191.389,163.017 v1(202.413,174.041)
I_MEMORY.ADDR1_Data_mem2: MEM2_ADDR.3 MEMORY2.4 | length 26.3
  Top Layer w0.1: MEMORY2.4@109.994,173.959 v1(113.69,173.959)
  layer 3 w0.1: v1(113.69,173.959) 116.744,173.959 MEM2_ADDR.3@130.556,160.147
I_MEMORY.ADDR2_Data_mem1: MEM1_ADDR.5 MEMORY1.3 | length 41.4
  Top Layer w0.1: MEMORY1.3@203.72,173.286 204.818,173.286 v1(204.826,173.279)
  layer 4 w0.1: MEM1_ADDR.5@174.625,157.226 173.711,158.14 173.711,160.934 186.055,173.279 v1(204.826,173.279)
I_MEMORY.ADDR2_Data_mem2: MEM2_ADDR.5 MEMORY2.3 | length 23.4
  Top Layer w0.1: MEMORY2.3@109.994,173.159 v1(111.303,173.159)
  layer 3 w0.1: v1(111.303,173.159) 115.004,173.159 MEM2_ADDR.5@128.016,160.147
I_MEMORY.ADDR3_Data_mem1: MEM1_ADDR.7 MEMORY1.2 | length 40.4
  Top Layer w0.1: v1(202.621,172.491) 202.627,172.486 MEMORY1.2@203.72,172.486
  Bottom Layer w0.1: MEM1_ADDR.7@177.165,157.226 178.156,156.235 185.725,156.235 186.284,156.794 186.284,163.297 197.46,174.473 202.641,174.473 202.768,174.346 202.768,172.638 v1(202.621,172.491)
I_MEMORY.ADDR3_Data_mem2: MEM2_ADDR.7 MEMORY2.2 | length 28.8
  Top Layer w0.1: v1(108.89,174.142) 108.89,172.588 109.118,172.359 MEMORY2.2@109.994,172.359
  layer 3 w0.1: v1(108.89,174.142) 110.439,175.692 110.973,175.692 111.506,175.158 111.506,174.168 110.947,173.609 110.947,172.364 122.199,161.112 124.511,161.112 MEM2_ADDR.7@125.476,160.147
I_MEMORY.ADDR4_Data_mem1: MEM1_ADDR.9 MEMORY1.1 | length 36.1
  Top Layer w0.1: MEMORY1.1@203.72,171.686 204.996,171.686 v1(205.003,171.679)
  layer 4 w0.1: MEM1_ADDR.9@179.705,157.226 181,155.931 188.417,155.931 188.951,156.464 188.951,160.655 190.754,162.458 195.783,162.458 v1(205.003,171.679)
I_MEMORY.ADDR4_Data_mem2: MEM2_ADDR.9 MEMORY2.1 | length 17.9
  Top Layer w0.1: MEMORY2.1@109.994,171.559 v1(111.1,171.559)
  layer 3 w0.1: v1(111.1,171.559) 122.123,160.535 122.123,160.147 MEM2_ADDR.9@122.936,160.147
I_MEMORY.ADDR5_Data_mem1: MEM1_ADDR.11 MEMORY1.44 | length 20.3
  Top Layer w0.1: MEMORY1.44@192.52,171.686 v1(193.624,171.686)
  Bottom Layer w0.1: MEM1_ADDR.11@182.245,157.226 183.515,158.496 183.515,161.577 v1(193.624,171.686)
I_MEMORY.ADDR5_Data_mem2: MEM2_ADDR.11 MEMORY2.44 | length 26.3
  Top Layer w0.1: MEMORY2.44@98.794,171.559 v1(100.101,171.559)
  layer 5 w0.1: v1(100.101,171.559) 108.984,171.559 MEM2_ADDR.11@120.396,160.147
I_MEMORY.ADDR6_Data_mem1: MEM1_ADDR.13 MEMORY1.43 | length 21.1
  Top Layer w0.1: MEMORY1.43@192.52,172.486 v1(194.361,172.486)
  Bottom Layer w0.1: MEM1_ADDR.13@184.785,157.226 185.928,158.369 185.928,163.449 194.361,171.882 v1(194.361,172.486)
I_MEMORY.ADDR6_Data_mem2: MEM2_ADDR.13 MEMORY2.43 | length 26.3
  Top Layer w0.1: v1(97.688,172.364) 97.694,172.359 MEMORY2.43@98.794,172.359
  layer 5 w0.1: v1(97.688,172.364) 108.941,161.112 116.891,161.112 MEM2_ADDR.13@117.856,160.147
I_MEMORY.ADDR7_Data_mem1: MEM1_ADDR.15 MEMORY1.42 | length 30.2
  Top Layer w0.1: MEM1_ADDR.15@187.325,157.226 189.306,155.245 195.453,155.245 195.859,155.651 195.859,172.72 195.293,173.286 MEMORY1.42@192.52,173.286
I_MEMORY.ADDR7_Data_mem2: MEM2_ADDR.15 MEMORY2.42 | length 26.4
  Top Layer w0.1: v1(97.333,173.159) MEMORY2.42@98.794,173.159
  layer 5 w0.1: v1(97.333,173.159) 97.333,171.958 109.347,159.944 109.347,159.715 109.83,159.233 114.402,159.233 MEM2_ADDR.15@115.316,160.147
I_MEMORY.ADDR8_Data_mem1: MEM1_ADDR.17 MEMORY1.28 | length 48.2
  Top Layer w0.1: MEM1_ADDR.17@189.865,157.226 188.595,158.496 186.817,158.496 186.411,158.09 186.411,155.245 186.817,154.838 195.656,154.838 196.063,155.245 196.063,181.768 193.345,184.486 MEMORY1.28@192.52,184.486
I_MEMORY.ADDR8_Data_mem2: MEM2_ADDR.17 MEMORY2.28 | length 35.4
  Top Layer w0.1: MEMORY2.28@98.794,184.359 99.974,184.359 100.635,183.699 100.635,166.472 106.477,160.63 106.477,159.639 106.883,159.233 111.862,159.233 MEM2_ADDR.17@112.776,160.147
I_MEMORY.ADDR9_Data_mem1: MEM1_ADDR.19 MEMORY1.27 | length 30.2
  Top Layer w0.1: MEM1_ADDR.19@192.405,157.226 191.059,158.572 191.059,175.652 190.658,176.053 190.658,184.53 191.414,185.286 MEMORY1.27@192.52,185.286
I_MEMORY.ADDR9_Data_mem2: MEM2_ADDR.19 MEMORY2.27 | length 31.7
  Top Layer w0.1: v1(97.79,185.471) 97.79,185.268 97.899,185.159 MEMORY2.27@98.794,185.159
  layer 3 w0.1: v1(97.79,185.471) 102.921,180.34 102.921,167.462 MEM2_ADDR.19@110.236,160.147
I_MEMORY.ADDR10_Data_mem1: MEM1_ADDR.21 MEMORY1.26 | length 36.5
  Top Layer w0.1: MEMORY1.26@192.52,186.086 191.649,186.086 190.458,184.895 190.458,175.853 190.856,175.455 190.856,156.058 191.262,155.651 193.37,155.651 MEM1_ADDR.21@194.945,157.226
I_MEMORY.ADDR10_Data_mem2: MEM2_ADDR.21 MEMORY2.26 | length 30
  Top Layer w0.1: MEMORY2.26@98.794,185.959 99.619,185.959 99.847,185.73 99.847,185.324 100.858,184.314 100.858,166.985 MEM2_ADDR.21@107.696,160.147
I_MEMORY.ADDR11_Data_mem1: MEM1_ADDR.23 MEMORY1.25 | length 33.3
  Top Layer w0.1: v1(191.414,186.886) MEMORY1.25@192.52,186.886
  layer 3 w0.1: v1(191.414,186.886) 196.215,182.085 196.215,158.496 MEM1_ADDR.23@197.485,157.226
I_MEMORY.ADDR11_Data_mem2: MEM2_ADDR.23 MEMORY2.25 | length 31.3
  Top Layer w0.1: MEMORY2.25@98.794,186.759 97.942,186.759 96.938,185.754 96.938,168.365 MEM2_ADDR.23@105.156,160.147
I_MEMORY.ADDR12_Data_mem1: MEM1_ADDR.25 MEMORY1.24 | length 36.3
  Top Layer w0.1: MEMORY1.24@192.52,187.686 195.885,187.686 200.939,182.631 200.939,158.14 MEM1_ADDR.25@200.025,157.226
I_MEMORY.ADDR12_Data_mem2: MEM2_ADDR.25 MEMORY2.24 | length 31.4
  Top Layer w0.1: MEMORY2.24@98.794,187.559 97.536,187.559 96.738,186.761 96.738,166.025 MEM2_ADDR.25@102.616,160.147
I_MEMORY.ADDR13_Data_mem1: MEM1_ADDR.27 MEMORY1.23 | length 38.1
  Top Layer w0.1: MEMORY1.23@192.52,188.486 197.111,188.486 201.297,184.301 201.297,158.494 MEM1_ADDR.27@202.565,157.226
I_MEMORY.ADDR13_Data_mem2: MEM2_ADDR.27 MEMORY2.23 | length 30.6
  Top Layer w0.1: v1(97.688,188.366) 97.696,188.359 MEMORY2.23@98.794,188.359
  layer 3 w0.1: v1(97.688,188.366) 97.333,188.011 97.333,183.083 98.908,181.508 98.908,161.315 MEM2_ADDR.27@100.076,160.147
I_MEMORY.ADDR14_Data_mem1: MEM1_ADDR.29 MEMORY1.22 | length 33.4
  Top Layer w0.1: MEMORY1.22@203.72,188.486 205.181,188.486 206.019,187.648 206.019,158.14 MEM1_ADDR.29@205.105,157.226
I_MEMORY.ADDR14_Data_mem2: MEM2_ADDR.29 MEMORY2.22 | length 35.7
  Top Layer w0.1: v1(106.069,188.359) MEMORY2.22@109.994,188.359
  Bottom Layer w0.1: MEM2_ADDR.29@97.536,160.147 105.619,168.23 105.619,187.909 v1(106.069,188.359)
I_MEMORY.ADDR15_Data_mem1: MEM1_ADDR.31 MEMORY1.21 | length 38.5
  Top Layer w0.1: MEMORY1.21@203.72,187.686 202.895,187.686 202.768,187.813 202.768,188.697 202.997,188.925 206.273,188.925 208.559,186.639 208.559,158.14 MEM1_ADDR.31@207.645,157.226
I_MEMORY.ADDR15_Data_mem2: MEM2_ADDR.31 MEMORY2.21 | length 39.3
  Top Layer w0.1: v1(105.969,187.559) MEMORY2.21@109.994,187.559
  Bottom Layer w0.1: MEM2_ADDR.31@94.996,160.147 95.91,159.233 98.501,159.233 98.984,159.715 98.984,160.934 105.969,167.919 v1(105.969,187.559)
I_MEMORY.ADDR16_Data_mem1: MEM1_ADDR.33 MEMORY1.20 | length 39.2
  Top Layer w0.1: MEMORY1.20@203.72,186.886 205.036,186.886 205.373,186.549 205.373,161.838 204.191,160.655 204.191,156.464 204.8,155.854 208.813,155.854 MEM1_ADDR.33@210.185,157.226
I_MEMORY.ADDR16_Data_mem2: MEM2_ADDR.33 MEMORY2.20 | length 41.6
  Top Layer w0.1: v1(107.569,186.759) MEMORY2.20@109.994,186.759
  Bottom Layer w0.1: MEM2_ADDR.33@92.456,160.147 93.624,158.979 100.381,158.979 100.99,159.588 100.99,161.493 107.569,168.072 v1(107.569,186.759)
I_MEMORY.ADDR17_Data_mem1: MEM1_ADDR.35 MEMORY1.19 | length 35
  Top Layer w0.1: v1(202.26,186.086) MEMORY1.19@203.72,186.086
  layer 3 w0.1: v1(202.26,186.086) 201.864,185.689 201.864,174.087 211.099,164.852 211.099,158.852 MEM1_ADDR.35@212.725,157.226
I_MEMORY.ADDR17_Data_mem2: MEM2_ADDR.35 MEMORY2.19 | length 45.3
  Top Layer w0.1: MEMORY2.19@109.994,185.959 110.947,185.959 111.1,186.111 v1(111.1,186.538)
  Bottom Layer w0.1: MEM2_ADDR.35@89.916,160.147 89.916,170.104 99.415,179.603 100.116,179.603 100.813,180.299 100.813,186.157 103.962,189.306 108.331,189.306 v1(111.1,186.538)
I_MEMORY.ADDR18_Data_mem1: MEM1_ADDR.37 MEMORY1.18 | length 47
  Top Layer w0.1: MEMORY1.18@203.72,185.286 202.343,185.286 201.905,185.725 201.905,189.027 202.387,189.509 206.832,189.509 216.179,180.162 216.179,158.14 MEM1_ADDR.37@215.265,157.226
I_MEMORY.ADDR18_Data_mem2: MEM2_ADDR.37 MEMORY2.18 | length 48.5
  Top Layer w0.1: v1(108.585,184.753) 108.991,185.159 MEMORY2.18@109.994,185.159
  Bottom Layer w0.1: MEM2_ADDR.37@87.376,160.147 88.29,159.233 90.449,159.233 90.932,159.715 90.932,169.545 101.016,179.629 101.016,185.776 104.242,189.001 107.544,189.001 108.585,187.96 v1(108.585,184.753)
I_MEMORY.BUS0_Data_mem1: MEM1_DATA.1 MEMORY1.7 | length 34.3
  Top Layer w0.1: MEMORY1.7@203.72,176.486 204.819,176.486 v1(204.826,176.479)
  Bottom Layer w0.1: v1(204.826,176.479) 214.401,186.055 214.401,204.445 MEM1_DATA.1@213.487,205.359
I_MEMORY.BUS0_Data_mem2: MEM2_DATA.1 MEMORY2.7 | length 36.4
  Top Layer w0.1: v1(106.883,176.359) MEMORY2.7@109.994,176.359
  layer 3 w0.1: MEM2_DATA.1@94.361,204.47 94.361,193.726 106.883,181.204 v1(106.883,176.359)
I_MEMORY.BUS1_Data_mem1: MEM1_DATA.3 MEMORY1.8 | length 32.6
  Top Layer w0.1: v1(202.616,177.292) 202.622,177.286 MEMORY1.8@203.72,177.286
  Bottom Layer w0.1: v1(202.616,177.292) 209.321,183.998 209.321,203.733 MEM1_DATA.3@210.947,205.359
I_MEMORY.BUS1_Data_mem2: MEM2_DATA.3 MEMORY2.8 | length 33.6
  Top Layer w0.1: v1(108.534,177.159) MEMORY2.8@109.994,177.159
  layer 3 w0.1: MEM2_DATA.3@96.901,204.47 96.901,196.037 107.366,185.572 107.366,178.327 v1(108.534,177.159)
I_MEMORY.BUS2_Data_mem1: MEM1_DATA.5 MEMORY1.9 | length 35.5
  Top Layer w0.1: MEMORY1.9@203.72,178.086 204.819,178.086 v1(204.826,178.079)
  Bottom Layer w0.1: v1(204.826,178.079) 203.632,176.886 202.362,176.886 201.864,177.384 201.864,184.16 206.807,189.103 206.807,203.759 MEM1_DATA.5@208.407,205.359
I_MEMORY.BUS2_Data_mem2: MEM2_DATA.5 MEMORY2.9 | length 32.7
  Top Layer w0.1: MEM2_DATA.5@99.441,204.47 100.076,203.835 100.076,185.42 101.067,184.429 101.067,183.852 106.959,177.959 MEMORY2.9@109.994,177.959
I_MEMORY.BUS3_Data_mem1: MEM1_DATA.7 MEMORY1.10 | length 31.2
  Top Layer w0.1: v1(202.616,178.892) 202.622,178.886 MEMORY1.10@203.72,178.886
  layer 3 w0.1: v1(202.616,178.892) 205.232,178.892 206.781,180.442 206.781,204.445 MEM1_DATA.7@205.867,205.359
I_MEMORY.BUS3_Data_mem2: MEM2_DATA.7 MEMORY2.10 | length 30.6
  Top Layer w0.1: v1(108.89,178.765) 108.896,178.759 MEMORY2.10@109.994,178.759
  layer 3 w0.1: MEM2_DATA.7@101.981,204.47 102.616,203.835 102.616,191.186 105.867,187.935 106.578,187.935 106.731,187.782 106.731,186.944 107.569,186.106 107.569,179.273 108.077,178.765 v1(108.89,178.765)
I_MEMORY.BUS4_Data_mem1: MEM1_DATA.9 MEMORY1.13 | length 26.6
  Top Layer w0.1: MEMORY1.13@203.72,181.286 v1(204.826,181.286)
  layer 3 w0.1: MEM1_DATA.9@203.327,205.359 202.413,204.445 202.413,189.281 203.606,188.087 203.606,182.505 v1(204.826,181.286)
I_MEMORY.BUS4_Data_mem2: MEM2_DATA.9 MEMORY2.13 | length 33.3
  Top Layer w0.1: MEM2_DATA.9@104.521,204.47 105.621,205.57 110.744,205.57 111.02,205.294 111.02,202.432 112.062,201.391 112.062,181.861 111.36,181.159 MEMORY2.13@109.994,181.159
I_MEMORY.BUS5_Data_mem1: MEM1_DATA.11 MEMORY1.14 | length 26.1
  Top Layer w0.1: v1(202.616,183.058) 202.616,182.264 202.794,182.086 MEMORY1.14@203.72,182.086
  layer 3 w0.1: MEM1_DATA.11@200.787,205.359 199.517,204.089 199.517,191.11 202.616,188.011 v1(202.616,183.058)
I_MEMORY.BUS5_Data_mem2: MEM2_DATA.11 MEMORY2.14 | length 28.9
  Top Layer w0.1: MEM2_DATA.11@107.061,204.47 107.961,205.37 110.16,205.37 110.501,205.029 110.501,201.741 111.658,200.584 111.658,182.442 111.176,181.959 MEMORY2.14@109.994,181.959
I_MEMORY.BUS6_Data_mem1: MEM1_DATA.13 MEMORY1.15 | length 27.7
  Top Layer w0.1: MEMORY1.15@203.72,182.886 204.82,182.886 v1(204.826,182.88)
  layer 5 w0.1: MEM1_DATA.13@198.247,205.359 196.621,203.733 196.621,191.084 v1(204.826,182.88)